# Altium PCB pcb.PcbDoc (part 2 of 2)
Units mm, origin at the board's own origin, x right, y up, seen from the top; angles counter-clockwise.
Board outline 152.4 x 101.6 mm, 4 copper layers (Top Layer, Internal Plane 1, Internal Plane 2, Bottom Layer); 121 components, 160 nets, 1544 pads, 60 vias.
Unrouted connection lines stored in the file: 211.
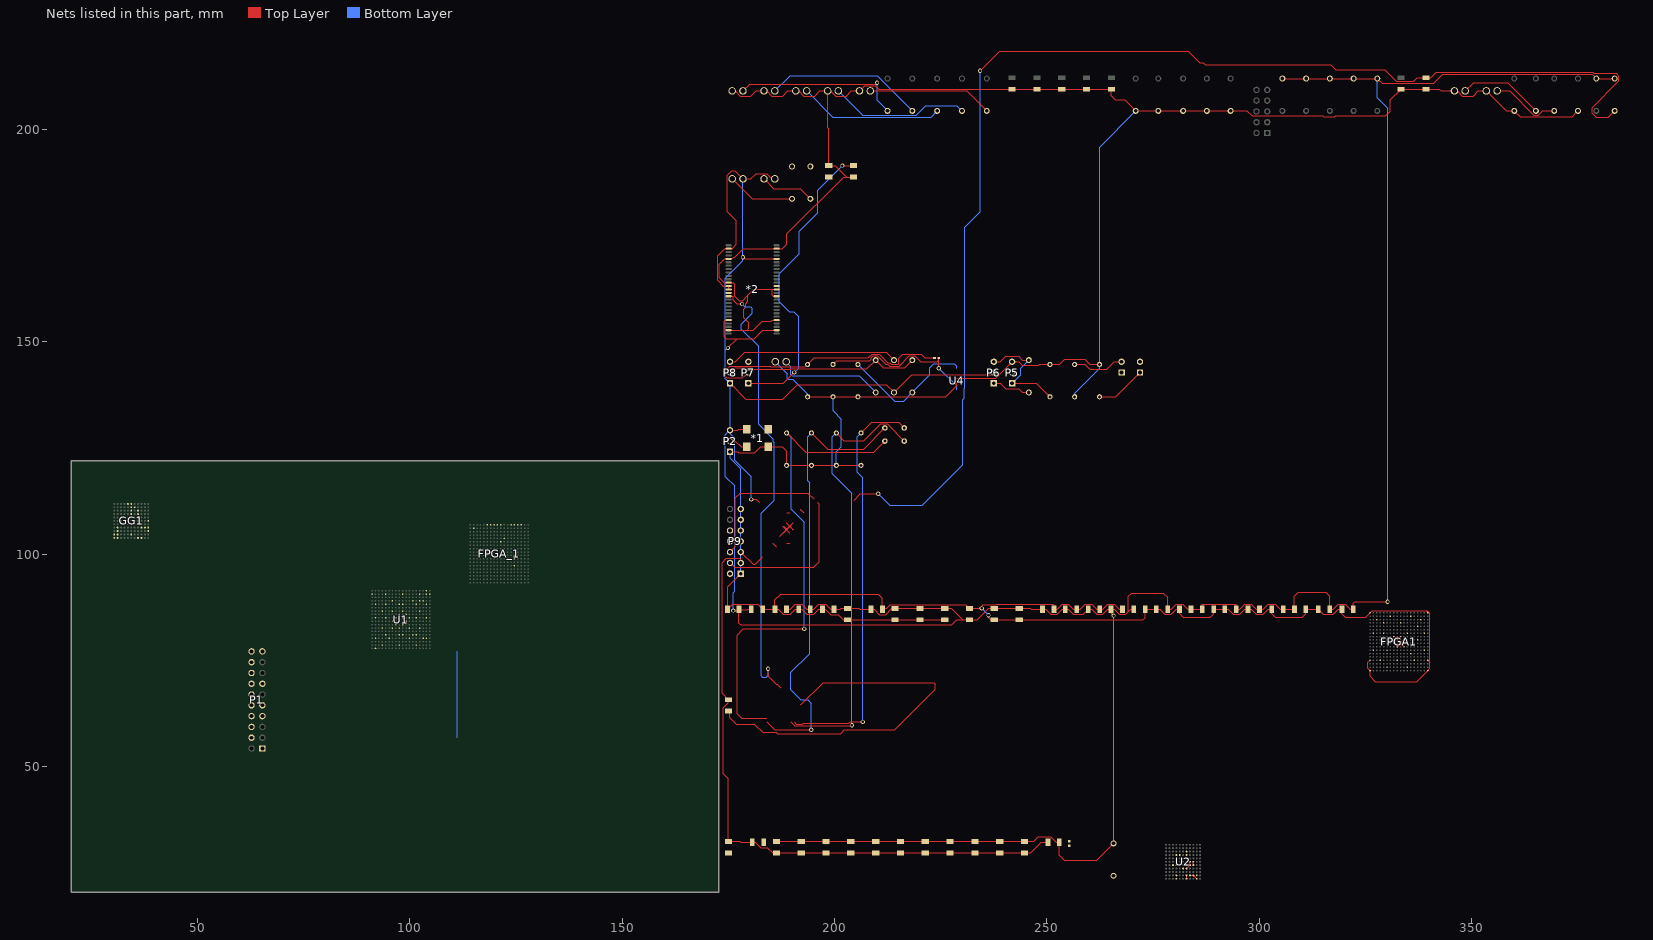
[diagram p4: the nets of this part, all layers, seen from the top]

## Via types
v1: diameter 1, hole 0.6, Top Layer to Bottom Layer, 60 vias

## Nets (pads, with @x,y where several pads share a name; then routed paths per layer and width w, separated by ;. In a path a pad name is that pad's centre, name@x,y a point inside that pad or via, vN(x,y) a via of type N, cw(c..) or ccw(c..) an arc to the next point about the centre after c; other vN are vias at no path point) (continued)
GPIO_FPGA3: C55.2 FPGA_1.A6 R7.1 | length 300
  Top Layer w0.2: 204.591,112.718 206.046,114.173 v1(210.312,114.173) ; v1(234.264,213.817) 238.868,218.421 283.261,218.421 286.036,215.646 286.817,215.646 287.274,215.189 316.865,215.189 318.033,214.02 329.514,214.02 332.232,211.303 336.318,211.303 337.185,212.17 C55.2@339.217,212.17 340.389,212.17 341.605,213.385 378.46,213.385 378.689,213.157 384.048,213.157 384.667,212.538 384.667,211.388 378.333,205.054 378.333,203.81 379.349,202.794 382.118,202.794 R7.1@383.667,204.343
  Bottom Layer w0.2: v1(210.312,114.173) 213.036,111.449 220.593,111.449 230.226,121.082 230.226,136.373 230.581,136.728 230.581,139.09 230.632,139.141 230.632,176.911 234.264,180.543 v1(234.264,213.817)
GPIO_FPGA4: FPGA_1.A7
GPIO_FPGA5: FPGA_1.A8
GPIO_FPGA6: FPGA_1.A9
GPIO_FPGA7: FPGA_1.A10
GPIO_FPGA8: FPGA_1.F10
GPIO_FPGA9: FPGA_1.E11
GPIO_FPGA10: FPGA_1.A13
GPIO_FPGA11: FPGA_1.A14
GPIO_FPGA12: FPGA_1.A15
GPIO_FPGA13: FPGA_1.A16
GPIO_FPGA14: FPGA_1.B2
Net1_1: 1.1 R3.1 | length 25.2
  Bottom Layer w0.2: 1.1@188.595,145.288 189.725,144.158 189.725,142.227 189.992,141.961 205.765,141.961 R3.1@209.677,138.049
Net*1_1: *1.1 P2.2 | length 4.5
  Top Layer w0.2: P2.2@175.387,126.619 176.657,126.619 178.054,125.222 *1.1@179.324,125.222
Net*1_3: *1.3 FPGA_1.L12
Net*2_15: *2.15 FPGA_1.L14 GG1.B6
Net*2_16: *2.16 GG1.A5 | length 108.6
  Top Layer w0.2: *2.16@175.071,160.706 176.096,160.706 176.096,159.768 176.987,158.877 v1(178.232,158.877) ; v1(184.353,72.974) 184.353,71.216 186.253,69.316 186.487,69.316 187.287,68.516
  Bottom Layer w0.2: v1(178.232,158.877) 178.867,158.242 180.238,158.242 180.67,157.81 180.67,156.743 178.054,154.127 178.054,152.984 182.118,148.92 182.118,130.531 185.596,127.052 185.596,126.39 185.82,126.167 185.82,112.667 182.74,109.588 182.74,71.323 183.02,71.044 183.896,71.044 184.353,71.501 v1(184.353,72.974)
Net*2_42: *2.42 FPGA_1.N14 GG1.C6
NetACS1_3: GG1.H9
NetACS1_4: P6.1 R1.1 | length 9.1
  Top Layer w0.2: P6.1@237.49,140.208 239.014,140.208 240.284,138.938 243.332,138.938 244.221,138.049 R1.1@245.745,138.049
NetACS1_5: C48.1 P5.1 P6.3 R1.2 | length 26.4
  Top Layer w0.2: P6.3@237.49,145.288 239.014,145.288 240.284,146.558 243.332,146.558 244.221,145.669 R1.2@245.745,145.669 ; P5.1@241.808,140.208 247.523,140.208 C48.1@250.698,137.033
  Bottom Layer w0.2: P5.1@241.808,140.208 243.789,142.189 243.789,143.713 R1.2@245.745,145.669
NetACS2_4: P8.3 R2.2 | length 40.3
  Top Layer w0.2: P8.3@175.387,145.288 176.624,145.288 178.805,147.469 212.195,147.469 R2.2@213.995,145.669
NetC42_2: C42.2 GG1.K1 X2.2 | length 116.4
  Top Layer w0.2: 184.087,61.316 178.104,61.316 177.038,62.382 177.038,80.899 178.511,82.372 v1(192.888,82.372) ; C42.2@188.722,128.524 193.243,124.003 209.246,124.003 X2.2@211.836,126.593
  Bottom Layer w0.2: C42.2@188.722,128.524 189.789,127.457 189.789,110.592 192.888,107.493 v1(192.888,82.372)
NetC43_2: C43.2 GG1.L1 X2.1 | length 107.4
  Top Layer w0.2: 184.087,60.516 185.954,58.649 v1(194.539,58.649) ; C43.2@194.564,128.524 198.374,124.714 206.857,124.714 X2.1@211.836,129.693
  Bottom Layer w0.2: v1(194.539,58.649) 194.539,64.821 193.675,65.684 192.049,65.684 189.662,68.072 189.662,72.136 194.107,76.581 194.107,116.84 193.65,117.297 193.65,127.61 C43.2@194.564,128.524
NetC44_2: C44.2 GG1.L8 X1.2 | length 106
  Top Layer w0.2: 189.687,60.516 190.612,59.591 203.965,59.591 v1(204.089,59.715) ; C44.2@200.406,128.524 202.209,126.721 206.923,126.721 210.845,130.643 212.358,130.643 X1.2@216.408,126.593
  Bottom Layer w0.2: C44.2@200.406,128.524 199.492,127.61 199.492,118.923 204.089,114.325 v1(204.089,59.715)
NetC45_2: C45.2 GG1.L9 X1.1 | length 97.3
  Top Layer w0.2: 190.487,60.516 191.012,59.991 192.483,59.991 192.608,60.116 203.302,60.116 203.701,60.515 206.591,60.515 v1(206.629,60.477) ; C45.2@206.248,128.524 208.767,131.043 215.058,131.043 X1.1@216.408,129.693
  Bottom Layer w0.2: C45.2@206.248,128.524 205.334,127.61 205.334,119.278 206.629,117.983 v1(206.629,60.477)
NetC46_1: C46.1 P4.1 | length 11.9
  Top Layer w0.2: C46.1@262.382,137.033 266.192,137.033 P4.1@271.907,142.748
NetC47_2: C47.2 P3.2 | length 12.3
  Top Layer w0.2: C47.2@256.54,144.653 258.877,144.653 260.045,143.485 264.084,143.485 265.887,145.288 P3.2@267.589,145.288
NetC49_2: C49.2 L1.1 P7.2 | length 61.6
  Top Layer w0.2: P7.2@179.705,142.748 178.435,141.478 174.574,141.478 174.337,141.715 174.337,143.256 175.302,144.221 184.861,144.221 184.988,144.094 193.116,144.094 C49.2@193.675,144.653 195.199,146.177 207.947,146.177 208.839,147.069 210.515,147.069 212.515,145.069 212.944,145.069 213.344,144.669 215.011,144.669 215.064,144.722 215.064,146.131 216.002,147.069 220.393,147.069 221.285,146.177 L1.1@223.528,146.177
NetC50_2: C50.2 L1.2 U4.1 | length 38.3
  Top Layer w0.2: C50.2@199.644,144.653 200.544,145.553 208.332,145.553 208.677,145.898 208.677,146.253 209.093,146.669 210.109,146.669 212.109,144.669 212.554,144.669 212.954,144.269 215.232,144.269 217.632,146.669 218.862,146.669 220.243,145.288 224.122,145.288 224.528,145.694 ; v1(224.528,143.772) 224.528,145.694 ; L1.2@224.528,146.177 224.528,145.694
  Bottom Layer w0.2: v1(224.528,143.772) 228.727,139.573 U4.1@228.727,138.303
NetC51_2: C51.2 FB1.1 U4.3 | length 32.6
  Bottom Layer w0.2: C51.2@205.486,144.653 214.147,135.992 216.256,135.992 FB1.1@218.313,138.049 222.453,142.189 222.453,143.916 223.317,144.78 228.194,144.78 228.727,144.247 U4.3@228.727,143.383
NetC53_1: C53.1
NetC_DEC1_1: C_DEC1.1 GG1.F11 | length 91.3
  Top Layer w0.2: C_DEC1.1@175.006,63.039 175.311,63.039 175.311,61.521 176.862,59.969 181.127,59.969 183.083,58.014 186.233,58.014 186.538,57.709 201.422,57.709 202.336,58.623 214.224,58.623 223.723,68.123 223.723,69.317 223.317,69.723 197.294,69.723 192.087,64.516
NetD1_2: D1.2 R4.1 | length 16
  Top Layer w0.2: D1.2@175.895,188.341 180.594,183.642 R4.1@189.992,183.642
NetD2_2: D2.2 R5.1 | length 12.9
  Top Layer w0.2: D2.2@183.388,188.341 185.725,186.004 191.948,186.004 R5.1@194.31,183.642
NetD3_1: D3.1 R9.1 | length 20.2
  Top Layer w0.2: D3.1@348.488,209.042 350.444,210.998 358.47,210.998 R9.1@365.125,204.343
NetD4_1: D4.1 R10.1 | length 16.2
  Top Layer w0.2: D4.1@355.981,209.042 358.927,209.042 364.626,203.343 365.725,203.343 366.725,204.343 R10.1@369.443,204.343
NetD5_1: D5.1 R22.1 | length 40
  Top Layer w0.2: D5.1@178.435,209.042 180.024,210.631 209.666,210.631 v1(210.007,210.972)
  Bottom Layer w0.2: v1(210.007,210.972) 210.007,206.807 R22.1@212.471,204.343
NetD6_1: D6.1 R23.1 | length 37.3
  Bottom Layer w0.2: D6.1@185.928,209.042 189.535,212.649 210.007,212.649 R23.1@218.313,204.343
NetD7_1: D7.1 R24.1 | length 33.9
  Bottom Layer w0.2: D7.1@193.421,209.042 199.568,202.895 222.707,202.895 R24.1@224.155,204.343
NetD8_1: D8.1 R25.1 | length 32.9
  Bottom Layer w0.2: D8.1@200.914,209.042 206.629,203.327 219.227,203.327 221.463,205.562 228.778,205.562 R25.1@229.997,204.343
NetD9_1: D9.1 R26.1 | length 29.4
  Top Layer w0.2: D9.1@208.407,209.042 231.14,209.042 R26.1@235.839,204.343
NetFB1_2: FB1.2 P8.2 R3.2 | length 45.8
  Top Layer w0.2: P8.2@175.387,142.748 176.454,143.815 180.492,143.815 180.746,143.561 189.725,143.561 189.738,143.573 207.581,143.573 R3.2@209.677,145.669 211.477,143.869 216.513,143.869 FB1.2@218.313,145.669
NetFPGA_1_K14: FPGA_1.K14 GG1.D6
NetGG1_A6: GG1.A6
NetGG1_B7: GG1.B7
NetGG1_H2: GG1.H2
NetGG1_H10: GG1.H10
NetGG1_H11: GG1.H11
NetGG1_J2: GG1.J2
NetGG1_K2: GG1.K2
NetGG1_K6: GG1.K6 P1.19
NetGG1_L2: GG1.L2
NetL_VDD1_1: L_VDD1.1 U2.K8 U2.K9 U2.L10 | length 1.9
  Top Layer w0.2: U2.K8@283.667,24.359 U2.K9@284.455,24.359 ; U2.K9@284.467,24.359 U2.K9@284.455,24.359 ; U2.L10@285.267,23.559 285.255,23.559 U2.K9@284.455,24.359
NetL_VDD1_2: L_VDD1.2 R_AVDD1.1
NetP5_2: P5.2
NetP9_4: P9.4 U1.B18 | length 36.2
  Top Layer w0.2: P9.4@175.387,97.917 176.454,96.85 195.097,96.85 196.393,98.146 196.393,111.682 195.903,112.172
NetP9_6: P9.6 U1.A17 | length 32.8
  Top Layer w0.2: P9.6@175.387,100.457 176.657,101.727 176.657,113.233 177.8,114.376 193.699,114.376 195.103,112.972
NetP9_8: P9.8 U1.D16
NetP9_10: P9.10 U1.D15
NetR4_2: R4.2
NetR5_2: R5.2
PWRIN: P7.3
SWCLK: GG1.E8 P1.9
SWDIO: GG1.D8 P1.7
SWO: GG1.C8 P1.13
TOADC: GG1.J11
USB_5V: C52.2 P7.1 | length 72.3
  Top Layer w0.2: P7.1@179.705,140.208 187.96,140.208 v1(190.525,142.773) ; v1(201.854,191.465) 201.858,191.469 C52.2@204.47,191.469
  Bottom Layer w0.2: v1(190.525,142.773) 191.541,143.789 191.541,155.854 190.373,157.023 189.382,157.023 186.969,159.436 186.969,166.04 191.643,170.713 191.643,175.997 196.063,180.416 196.063,185.674 v1(201.854,191.465)
USB_GND: 1.2 *1.2 *2.5 *2.12 *2.26 *2.32 *2.39 *2.41 *2.53 C1.2 C2.2 C3.2 C4.2 C5.2 C6.1 C7.1 C8.2 C9.1 C10.1 C11.1 C12.2 C13.1 C14.1 C15.1 C16.2 C17.1 C18.1 C19.1 C20.1 C21.2 C22.1 C23.1 C24.1 C25.2 C26.1 C27.1 C28.1 C29.1 C30.1 C31.1 C32.1 C33.1 C34.1 C35.1 C36.1 C37.1 C38.1 C39.1 C40.2 C41.1 C42.1 C43.1 C44.1 C45.1 C46.2 C47.1 C48.2 C49.1 C50.1 C51.1 C52.1 C53.2 C54.1 C55.1 C56.1 C57.1 C58.1 C59.1 C60.1 C_DEC1.2 D3.2 D4.2 D5.2 D6.2 D7.2 D8.2 D9.2 FPGA1.A1 FPGA1.A18 FPGA1.B7 FPGA1.B13 FPGA1.C3 FPGA1.C16 FPGA1.D5 FPGA1.D10 FPGA1.E15 FPGA1.G2 FPGA1.G5 FPGA1.G12 FPGA1.G17 FPGA1.H8 FPGA1.H10 FPGA1.J4 FPGA1.J9 FPGA1.J11 FPGA1.J15 FPGA1.K8 FPGA1.K10 FPGA1.L9 FPGA1.L11 FPGA1.M2 FPGA1.M6 FPGA1.M17 FPGA1.N13 FPGA1.R1 FPGA1.R4 FPGA1.R9 FPGA1.R14 FPGA1.R18 FPGA1.T16 FPGA1.U6 FPGA1.U12 FPGA1.V1 FPGA1.V18 P1.4 P1.6 P1.8 P1.10 P1.12 P1.14 P1.16 P1.18 P1.20 P2.1 P5.3 P9.1 P9.3 P9.5 P9.7 P9.9 P9.11 P9.13 R8.1 R11.1 R17.1 R18.1 R19.1 R20.1 R21.1 U1.P13 U1.R16 U1.V2 U2.C7 U2.D4 U2.F9 U2.G3 U2.G9 U2.H6 U2.K4 U2.K7 U2.K10 U2.L7 U4.2 | length 1072.2
  Top Layer w0.2: *2.26@175.071,152.706 179.426,152.706 ; P2.1@175.387,124.079 177.216,124.079 177.495,123.8 181.153,123.8 182.575,125.222 *1.2@184.404,125.222 187.655,125.222 188.722,124.155 C42.1@188.722,120.904 C43.1@194.564,120.904 C44.1@200.406,120.904 C45.1@206.248,120.904 ; D5.2@175.895,209.042 176.581,209.042 177.775,207.848 180.315,207.848 181.508,209.042 D6.2@183.388,209.042 184.048,209.042 185.242,207.848 187.808,207.848 189.001,209.042 D7.2@190.881,209.042 191.541,209.042 192.735,207.848 195.301,207.848 196.494,209.042 D8.2@198.374,209.042 ; P9.1@177.927,95.377 174.799,92.249 C15.1@174.799,86.995 176.018,88.214 181.868,88.214 C16.2@183.087,86.995 C17.1@185.975,86.995 ; P9.3@177.927,97.917 177.927,98.755 177.698,98.984 174.549,98.984 173.533,97.968 173.533,67.212 C_DEC1.2@175.006,65.739 175.006,64.973 173.838,63.805 173.838,48.26 175.006,47.092 C40.2@175.006,32.338 177.698,32.338 177.905,32.131 C41.1@180.641,32.131 181.356,32.131 182.626,30.861 184.197,30.861 185.42,29.638 C32.1@186.309,29.638 C33.1@192.151,29.638 C34.1@197.993,29.638 C35.1@203.835,29.638 C36.1@209.677,29.638 C37.1@215.519,29.638 C38.1@221.361,29.638 C39.1@227.203,29.638 C28.1@233.045,29.638 C29.1@238.887,29.638 C30.1@244.729,29.638 246.228,29.638 248.721,32.131 C31.1@250.237,32.131 ; P9.5@177.927,100.457 180.823,97.561 181.292,97.561 183.103,99.372 ; *2.32@186.371,155.106 185.346,155.106 185.074,154.834 183.026,154.834 180.899,152.706 179.426,152.706 ; *2.39@186.371,160.706 185.572,160.706 185.344,160.934 185.344,162.306 ; *2.41@186.371,162.306 185.344,162.306 ; C49.1@193.675,137.033 C50.1@199.644,137.033 C51.1@205.486,137.033 226.187,137.033 228.727,139.573 U4.2@228.727,140.843 228.727,141.224 228.93,141.427 237.947,141.427 P5.3@241.808,145.288 243.332,145.288 244.196,144.424 248.107,144.424 248.336,144.653 C48.2@250.698,144.653 253.035,144.653 254.203,145.821 258.877,145.821 260.045,144.653 C46.2@262.382,144.653 ; C52.1@204.47,188.769 202.877,188.769 ; C21.2@211.281,86.995 C21.2@211.281,87.3 ; C24.1@225.933,84.502 C23.1@220.091,84.502 C22.1@214.249,84.502 C20.1@203.073,84.502 202.061,84.502 200.838,85.725 199.136,85.725 197.866,86.995 C19.1@197.151,86.995 196.291,86.995 195.123,85.827 193.497,85.827 192.329,86.995 C18.1@191.563,86.995 190.703,86.995 189.535,85.827 187.909,85.827 186.741,86.995 C17.1@185.975,86.995 ; v1(234.645,87.202) 234.065,87.202 ; v1(236.245,85.602) 236.245,84.985 236.728,84.502 C26.1@237.617,84.502 C27.1@243.459,84.502 272.593,84.502 273.13,85.039 C5.2@273.13,86.995 C6.1@275.764,86.995 276.53,86.995 277.698,85.827 279.273,85.827 280.441,86.995 C7.1@281.225,86.995 281.225,85.954 282.038,85.141 288.446,85.141 289.259,85.954 C8.2@289.259,86.995 C9.1@291.893,86.995 292.659,86.995 293.827,85.827 295.402,85.827 296.57,86.995 C10.1@297.354,86.995 298.12,86.995 299.288,85.827 300.914,85.827 302.082,86.995 C11.1@302.942,86.995 302.942,85.954 303.755,85.141 310.163,85.141 310.976,85.954 C12.2@310.976,86.995 C13.1@313.864,86.995 315.032,85.827 317.424,85.827 318.592,86.995 C14.1@319.452,86.995 319.452,85.954 320.29,85.115 325.007,85.115 FPGA1.A1@326.067,86.175 326.557,86.665 339.177,86.665 ; C4.2@267.796,86.995 267.03,86.995 265.862,88.163 264.363,88.163 263.195,86.995 C3.2@262.462,86.995 261.696,86.995 260.528,88.163 258.978,88.163 257.81,86.995 C2.2@257.001,86.995 256.235,86.995 255.067,88.163 253.568,88.163 252.4,86.995 C1.2@251.667,86.995 251.667,87.855 251.358,88.163 238.176,88.163 238.125,88.113 234.975,88.113 234.065,87.202 ; U2.L7@282.867,23.559 U2.K7@282.867,24.359 ; U2.G9@284.467,26.759 U2.F9@284.467,27.559 ; FPGA1.R1@326.067,74.975 325.577,74.485 325.577,73.065 FPGA1.V1@326.067,72.575 326.067,71.214 327.355,69.926 337.018,69.926 FPGA1.V18@339.667,72.575 340.157,73.065 340.157,74.485 ; FPGA1.K8@331.667,78.975 332.156,79.464 332.156,80.086 332.197,80.127 ; FPGA1.H8@331.667,80.575 331.749,80.575 332.197,80.127 ; FPGA1.K10@333.267,78.975 FPGA1.K10@333.261,78.975 ; FPGA1.H10@333.267,80.575 FPGA1.H10@333.261,80.575 ; FPGA1.L11@334.067,78.175 333.959,78.175 333.369,78.765 333.146,78.765 332.556,78.175 FPGA1.L9@332.467,78.175 332.461,78.175 FPGA1.K10@333.261,78.975 ; FPGA1.J11@334.067,79.775 FPGA1.J11@334.048,79.775 ; FPGA1.R18@339.667,74.975 340.157,74.485 ; FPGA1.A18@339.667,86.175 339.177,86.665 ; R8.1@375.031,204.343 373.631,202.943 361.445,202.943 R11.1@360.045,204.343 358.14,204.343 D4.2@353.441,209.042 351.561,209.042 350.368,207.848 347.802,207.848 346.608,209.042 D3.2@345.948,209.042 342.795,209.042 342.367,209.47 C55.1@339.217,209.47 C54.1@333.375,209.47 330.886,206.981 330.886,204.241 329.794,203.149 318.011,203.149 317.805,202.943 315.211,202.943 315.005,203.149 298.298,203.149 297.104,204.343 R17.1@293.243,204.343 R18.1@287.655,204.343 R19.1@282.067,204.343 R20.1@276.225,204.343 R21.1@270.891,204.343 268.326,206.908 266.141,206.908 265.176,207.874 C60.1@265.176,209.47 C59.1@259.334,209.47 C58.1@253.492,209.47 C57.1@247.65,209.47 C56.1@241.808,209.47 210.362,209.47 209.601,210.231 207.056,210.231 D9.2@205.867,209.042 203.987,209.042 202.794,207.848 200.228,207.848 199.034,209.042 D8.2@198.374,209.042 ; 179.426,152.706 179.845,153.125 179.845,154.47 178.638,155.677 178.638,157.691 179.032,158.084 179.032,158.991 179.527,159.487 179.527,160.884 ; 179.527,160.884 178.328,159.684 177.543,159.684 176.496,160.731 176.496,163.584 176.174,163.906 *2.12@175.071,163.906 174.067,163.906 172.86,165.113 172.86,168.223 174.142,169.506 *2.5@175.071,169.506 175.816,169.506 176.223,169.913 176.505,169.913 178.498,171.906 *2.53@186.371,171.906 187.683,171.906 188.7,172.923 188.7,175.362 202.108,188.769 202.877,188.769 ; 179.527,160.884 180.95,162.306 185.344,162.306 ; C17.1@185.975,86.995 185.975,89.205 187.296,90.526 210.312,90.526 211.281,89.557 C21.2@211.281,87.3 ; D8.2@198.374,209.042 198.374,200.381 198.628,200.127 C53.2@198.628,191.469 200.177,191.469 202.877,188.769 ; C21.2@211.281,87.3 212.344,87.3 213.106,88.062 230.915,88.062 C25.2@231.775,87.202 233.672,87.202 234.065,87.202 ; 332.197,80.127 332.34,79.985 332.562,79.985 333.153,80.575 FPGA1.H10@333.261,80.575 ; FPGA1.K10@333.261,78.975 333.248,78.975 FPGA1.J11@334.048,79.775 ; FPGA1.H10@333.261,80.575 332.461,79.775 FPGA1.J9@332.467,79.775 332.562,79.775 333.165,79.172 333.35,79.172 333.953,79.775 FPGA1.J11@334.048,79.775 ; 339.177,86.665 339.547,86.665 340.157,86.055 340.157,74.485
  Bottom Layer w0.2: 111.125,56.769 111.125,59.309 111.125,61.849 111.125,64.389 111.125,66.929 111.125,69.469 111.125,72.009 111.125,74.549 111.125,77.089 ; P2.1@175.387,124.079 175.387,122.58 177.927,120.04 P9.13@177.927,110.617 P9.11@177.927,108.077 P9.9@177.927,105.537 P9.7@177.927,102.997 P9.5@177.927,100.457 P9.3@177.927,97.917 P9.1@177.927,95.377 ; 1.2@186.055,145.288 188.84,142.503 188.84,141.427 189.107,141.161 190.182,141.161 193.675,137.668 C49.1@193.675,137.033 ; C50.1@199.644,137.033 199.644,133.731 201.574,131.801 201.574,125.298 200.406,124.13 C44.1@200.406,120.904 ; v1(234.645,87.202) v1(236.245,85.602) ; C47.1@256.54,137.033 256.54,137.922 262.382,143.764 C46.2@262.382,144.653 262.382,195.834 R21.1@270.891,204.343
USB_VREGI: C41.2
USB_VREGO: C40.1
VCC12: P4.2 U1.G7 U1.H9 U1.H11 U1.J8 U1.J10 U1.K9 U1.K11 U1.L8 U1.L10 U1.M7 U1.M12 | length 14.2
  Top Layer w0.2: 187.103,104.172 187.096,104.172 187.896,104.972 187.903,104.972 ; 188.703,107.372 188.703,107.258 189.306,106.655 189.306,106.477 ; 189.503,104.972 189.389,104.972 188.798,105.562 188.576,105.562 187.985,104.972 187.903,104.972 ; 189.503,106.572 189.484,106.572 ; 190.303,105.772 190.246,105.829 190.189,105.772 189.752,106.209 ; 190.303,107.372 190.293,107.362 ; 187.903,104.972 187.903,105.054 188.493,105.645 188.493,105.867 187.903,106.458 187.903,106.572 187.985,106.572 188.589,105.969 188.798,105.969 189.306,106.477 ; 189.306,106.477 189.306,106.47 188.703,105.867 188.703,105.772 188.798,105.772 189.401,106.375 189.586,106.375 189.752,106.209 ; 189.306,106.477 189.401,106.572 189.484,106.572 ; 189.484,106.572 190.284,107.372 190.293,107.362 ; 189.752,106.209 189.809,106.266 189.809,106.878 190.293,107.362
VCC18: P3.1
VCC33: *1.4 *2.2 *2.13 *2.14 *2.23 *2.29 *2.50 C1.1 C2.1 C3.1 C4.1 C5.1 C6.2 C7.2 C8.1 C9.2 C10.2 C11.2 C12.1 C13.2 C14.2 C15.2 C16.1 C17.2 C18.2 C19.2 C20.2 C21.1 C22.2 C23.2 C24.2 C25.1 C26.2 C27.2 C28.2 C29.2 C30.2 C31.2 C32.2 C33.2 C34.2 C35.2 C36.2 C37.2 C38.2 C39.2 D1.1 D2.1 P1.1 P2.3 P6.2 P8.1 R2.1 R6.2 R7.2 R12.2 R13.2 R14.2 R15.2 R16.2 R_AVDD1.2 U1.B1 U1.B5 U1.B10 U1.B15 U1.B17 U1.D7 U1.D13 U1.E2 U1.E5 U1.E9 U1.E10 U1.E14 U1.E17 U1.G4 U1.G10 U1.G15 U1.J2 U1.J5 U1.J12 U1.J14 U1.J17 U1.K7 U1.M4 U1.M9 U1.M15 U1.P5 U1.P9 U1.P10 U1.P14 U1.R2 U1.R6 U1.R12 U1.R17 U1.U4 U1.U9 U1.U14 U2.D5 U2.D7 U2.F8 U2.G4 U2.G8 U2.H7 U2.L4 | length 859.5
  Top Layer w0.2: v1(174.904,148.539) 177.063,150.698 ; *2.23@175.071,155.106 174.308,155.106 174.041,154.838 174.041,151.206 174.549,150.698 177.063,150.698 ; *2.14@175.071,162.306 *2.13@175.071,163.106 173.815,163.106 172.446,164.475 172.446,170.21 174.142,171.906 *2.2@175.071,171.906 175.868,171.906 176.886,172.923 176.886,178.435 174.701,180.619 174.701,189.179 175.819,190.297 176.479,190.297 D1.1@178.435,188.341 180.315,188.341 181.508,189.535 184.048,189.535 185.242,188.341 D2.1@185.928,188.341 ; P2.3@175.387,129.159 177.216,129.159 177.479,129.422 *1.4@179.324,129.422 ; P8.1@175.387,140.208 179.121,136.474 187.858,136.474 191.237,139.852 212.192,139.852 R2.1@213.995,138.049 218.161,142.215 236.957,142.215 P6.2@237.49,142.748 ; v1(176.149,86.69) C15.2@177.499,86.69 ; C15.2@177.499,86.995 C15.2@177.499,86.895 ; v1(178.435,169.912) 178.841,169.506 *2.50@186.371,169.506 ; C16.1@180.387,86.995 179.686,86.995 179.586,86.895 C15.2@177.499,86.895 ; v1(180.391,112.878) 181.597,112.878 182.303,112.172 ; 185.503,102.572 185.496,102.572 186.296,101.772 186.303,101.772 ; C32.2@186.309,32.338 C33.2@192.151,32.338 C34.2@197.993,32.338 C35.2@203.835,32.338 C36.2@209.677,32.338 C37.2@215.519,32.338 C38.2@221.361,32.338 C39.2@227.203,32.338 C28.2@233.045,32.338 C29.2@238.887,32.338 C30.2@244.729,32.338 246.939,32.338 248.002,33.401 250.952,33.401 252.222,32.131 C31.2@252.937,32.131 252.937,29.058 254.08,27.915 261.722,27.915 R_AVDD1.2@265.684,31.877 ; *2.29@186.371,152.706 183.135,152.706 181.127,150.698 177.063,150.698 ; C17.2@188.675,86.995 189.535,86.995 190.703,88.163 192.329,88.163 193.497,86.995 C18.2@194.263,86.995 195.123,86.995 196.291,88.163 197.917,88.163 199.085,86.995 C19.2@199.851,86.995 201.346,86.995 201.553,87.202 C20.2@203.073,87.202 205.715,87.202 205.922,86.995 C21.1@208.581,86.995 209.296,86.995 210.566,85.725 212.014,85.725 213.491,87.202 C22.2@214.249,87.202 C23.2@220.091,87.202 C24.2@225.933,87.202 227.482,87.202 230.182,84.502 ; 188.703,102.572 189.503,102.572 ; 188.703,109.772 189.503,109.772 ; 191.903,110.572 191.897,110.572 192.697,109.772 192.703,109.772 ; v1(265.684,85.522) 265.096,86.11 C4.1@265.096,86.995 ; C5.1@270.43,86.995 269.697,86.995 269.113,86.411 ; U2.H7@282.867,25.959 282.854,25.959 283.654,26.759 U2.G8@283.667,26.759 U2.F8@283.667,27.559 ; R12.2@305.435,211.963 R13.2@311.023,211.963 R14.2@316.611,211.963 R15.2@322.199,211.963 R16.2@327.787,211.963 328.905,210.845 341.046,210.845 343.179,212.979 378.287,212.979 378.578,212.688 378.624,212.688 R6.2@379.349,211.963 R7.2@383.667,211.963 ; v1(330.2,88.798) 322.558,88.798 322.152,88.392 C14.2@322.152,86.995 321.386,86.995 320.218,88.163 318.592,88.163 317.424,86.995 C13.2@316.564,86.995 316.564,90.018 315.624,90.957 309.216,90.957 308.276,90.018 C12.1@308.276,86.995 C11.2@305.642,86.995 304.876,86.995 303.708,88.163 302.082,88.163 300.914,86.995 C10.2@300.054,86.995 299.288,86.995 298.12,88.163 296.545,88.163 295.377,86.995 C9.2@294.593,86.995 294.593,88.163 286.559,88.163 C8.1@286.559,86.995 C7.2@283.925,86.995 283.159,86.995 281.991,88.163 280.441,88.163 279.273,86.995 C6.2@278.464,86.995 278.464,89.781 277.415,90.83 269.926,90.83 269.113,90.018 269.113,86.411 ; C15.2@177.499,86.69 C15.2@177.499,86.895 ; C15.2@177.499,86.69 177.499,83.693 177.855,83.337 227.609,83.337 228.774,84.502 230.182,84.502 ; 230.182,84.502 C25.1@231.775,84.502 233.6,84.502 236.3,87.202 C26.2@237.617,87.202 C27.2@243.459,87.202 246.101,87.202 246.308,86.995 C1.1@248.967,86.995 249.733,86.995 250.901,85.827 252.4,85.827 253.568,86.995 C2.1@254.301,86.995 255.067,86.995 256.235,85.827 258.594,85.827 C3.1@259.762,86.995 260.528,86.995 261.696,85.827 263.195,85.827 264.363,86.995 C4.1@265.096,86.995 ; C4.1@265.096,86.995 265.862,86.995 267.03,85.827 268.529,85.827 269.113,86.411
  Bottom Layer w0.2: v1(174.904,148.539) 174.32,147.955 ; v1(176.149,86.69) 176.149,90.932 176.454,91.237 176.454,116.103 174.32,118.237 174.32,128.092 P2.3@175.387,129.159 ; D1.1@178.435,188.341 v1(178.435,169.912) 178.435,169.104 174.32,164.99 174.32,147.955 ; v1(180.391,112.878) 180.391,118.161 176.455,122.096 176.455,127.295 175.387,128.363 P2.3@175.387,129.159 ; R_AVDD1.2@265.684,31.877 v1(265.684,85.522) ; R16.2@327.787,211.963 327.787,207.391 330.2,204.978 v1(330.2,88.798) ; 174.32,147.955 174.32,141.275 P8.1@175.387,140.208 P2.3@175.387,129.159
VCC33V: P9.2
pads on no net: *2.40 *2.43 FPGA1.A2 FPGA1.A3 FPGA1.A4 FPGA1.A5 FPGA1.A6 FPGA1.A7 FPGA1.A8 FPGA1.A9 FPGA1.A10 FPGA1.A11 FPGA1.A12 FPGA1.A13 FPGA1.A14 FPGA1.A15 FPGA1.A16 FPGA1.A17 FPGA1.B1 FPGA1.B2 FPGA1.B3 FPGA1.B4 FPGA1.B5 FPGA1.B6 FPGA1.B8 FPGA1.B9 FPGA1.B10 FPGA1.B11 FPGA1.B12 FPGA1.B14 FPGA1.B15 FPGA1.B16 FPGA1.B17 FPGA1.B18 FPGA1.C1 FPGA1.C2 FPGA1.C4 FPGA1.C5 FPGA1.C6 FPGA1.C7 FPGA1.C8 FPGA1.C9 FPGA1.C10 FPGA1.C11 FPGA1.C12 FPGA1.C13 FPGA1.C14 FPGA1.C15 FPGA1.C17 FPGA1.C18 FPGA1.D1 FPGA1.D2 FPGA1.D3 FPGA1.D4 FPGA1.D6 FPGA1.D7 FPGA1.D8 FPGA1.D9 FPGA1.D11 FPGA1.D12 FPGA1.D13 FPGA1.D14 FPGA1.D15 FPGA1.D16 FPGA1.D17 FPGA1.D18 FPGA1.E1 FPGA1.E2 FPGA1.E3 FPGA1.E4 FPGA1.E5 FPGA1.E6 FPGA1.E7 FPGA1.E8 FPGA1.E9 FPGA1.E10 FPGA1.E11 FPGA1.E12 FPGA1.E13 FPGA1.E14 FPGA1.E16 FPGA1.E17 FPGA1.E18 FPGA1.F1 FPGA1.F2 FPGA1.F3 FPGA1.F4 FPGA1.F5 FPGA1.F6 FPGA1.F7 FPGA1.F8 FPGA1.F9 FPGA1.F10 FPGA1.F11 FPGA1.F12 FPGA1.F13 FPGA1.F14 FPGA1.F15 FPGA1.F16 FPGA1.F17 FPGA1.F18 FPGA1.G1 FPGA1.G3 FPGA1.G4 FPGA1.G6 FPGA1.G7 FPGA1.G8 FPGA1.G9 FPGA1.G10 FPGA1.G11 FPGA1.G13 FPGA1.G14 FPGA1.G15 FPGA1.G16 FPGA1.G18 FPGA1.H1 FPGA1.H2 FPGA1.H3 FPGA1.H4 FPGA1.H5 FPGA1.H6 FPGA1.H7 FPGA1.H9 FPGA1.H11 FPGA1.H12 FPGA1.H13 FPGA1.H14 FPGA1.H15 FPGA1.H16 FPGA1.H17 FPGA1.H18 FPGA1.J1 FPGA1.J2 FPGA1.J3 FPGA1.J5 FPGA1.J6 FPGA1.J7 FPGA1.J8 FPGA1.J10 FPGA1.J12 FPGA1.J13 FPGA1.J14 FPGA1.J16 FPGA1.J17 FPGA1.J18 FPGA1.K1 FPGA1.K2 FPGA1.K3 FPGA1.K4 FPGA1.K5 FPGA1.K6 FPGA1.K7 FPGA1.K9 FPGA1.K11 FPGA1.K12 FPGA1.K13 FPGA1.K14 FPGA1.K15 FPGA1.K16 FPGA1.K17 FPGA1.K18 FPGA1.L1 FPGA1.L2 FPGA1.L3 FPGA1.L4 FPGA1.L5 FPGA1.L6 FPGA1.L7 FPGA1.L8 FPGA1.L10 FPGA1.L12 FPGA1.L13 FPGA1.L14 FPGA1.L15 FPGA1.L16 FPGA1.L17 FPGA1.L18 FPGA1.M1 FPGA1.M3 FPGA1.M4 FPGA1.M5 FPGA1.M7 FPGA1.M8 FPGA1.M9 FPGA1.M10 FPGA1.M11 FPGA1.M12 FPGA1.M13 FPGA1.M14 FPGA1.M15 FPGA1.M16 FPGA1.M18 FPGA1.N1 FPGA1.N2 FPGA1.N3 FPGA1.N4 FPGA1.N5 FPGA1.N6 FPGA1.N7 FPGA1.N8 FPGA1.N9 FPGA1.N10 FPGA1.N11 FPGA1.N12 FPGA1.N14 FPGA1.N15 FPGA1.N16 FPGA1.N17 FPGA1.N18 FPGA1.P1 FPGA1.P2 FPGA1.P3 FPGA1.P4 FPGA1.P5 FPGA1.P6 FPGA1.P7 FPGA1.P8 FPGA1.P9 FPGA1.P10 FPGA1.P11 FPGA1.P12 FPGA1.P13 FPGA1.P14 FPGA1.P15 FPGA1.P16 FPGA1.P17 FPGA1.P18 FPGA1.R2 FPGA1.R3 FPGA1.R5 FPGA1.R6 FPGA1.R7 FPGA1.R8 FPGA1.R10 FPGA1.R11 FPGA1.R12 FPGA1.R13 FPGA1.R15 FPGA1.R16 FPGA1.R17 FPGA1.T1 FPGA1.T2 FPGA1.T3 FPGA1.T4 FPGA1.T5 FPGA1.T6 FPGA1.T7 FPGA1.T8 FPGA1.T9 FPGA1.T10 FPGA1.T11 FPGA1.T12 FPGA1.T13 FPGA1.T14 FPGA1.T15 FPGA1.T17 FPGA1.T18 FPGA1.U1 FPGA1.U2 FPGA1.U3 FPGA1.U4 FPGA1.U5 FPGA1.U7 FPGA1.U8 FPGA1.U9 FPGA1.U10 FPGA1.U11 FPGA1.U13 FPGA1.U14 FPGA1.U15 FPGA1.U16 FPGA1.U17 FPGA1.U18 FPGA1.V2 FPGA1.V3 FPGA1.V4 FPGA1.V5 FPGA1.V6 FPGA1.V7 FPGA1.V8 FPGA1.V9 FPGA1.V10 FPGA1.V11 FPGA1.V12 FPGA1.V13 FPGA1.V14 FPGA1.V15 FPGA1.V16 FPGA1.V17 FPGA_1.A1 FPGA_1.A4 FPGA_1.A11 FPGA_1.A12 FPGA_1.A17 FPGA_1.A18 FPGA_1.B1 FPGA_1.B3 FPGA_1.B4 FPGA_1.B5 FPGA_1.B6 FPGA_1.B7 FPGA_1.B10 FPGA_1.B11 FPGA_1.B12 FPGA_1.B13 FPGA_1.B14 FPGA_1.B15 FPGA_1.B16 FPGA_1.B17 FPGA_1.B18 FPGA_1.C1 FPGA_1.C2 FPGA_1.C3 FPGA_1.C4 FPGA_1.C5 FPGA_1.C6 FPGA_1.C8 FPGA_1.C9 FPGA_1.C10 FPGA_1.C11 FPGA_1.C12 FPGA_1.C13 FPGA_1.C14 FPGA_1.C15 FPGA_1.C16 FPGA_1.D1 FPGA_1.D2 FPGA_1.D3 FPGA_1.D4 FPGA_1.D5 FPGA_1.D6 FPGA_1.D7 FPGA_1.D8 FPGA_1.D9 FPGA_1.D10 FPGA_1.D11 FPGA_1.D12 FPGA_1.D13 FPGA_1.D14 FPGA_1.D15 FPGA_1.D16 FPGA_1.E1 FPGA_1.E2 FPGA_1.E3 FPGA_1.E4 FPGA_1.E5 FPGA_1.E6 FPGA_1.E7 FPGA_1.E8 FPGA_1.E9 FPGA_1.E10 FPGA_1.E12 FPGA_1.E13 FPGA_1.E14 FPGA_1.E15 FPGA_1.E17 FPGA_1.F1 FPGA_1.F2 FPGA_1.F3 FPGA_1.F4 FPGA_1.F5 FPGA_1.F6 FPGA_1.F7 FPGA_1.F8 FPGA_1.F9 FPGA_1.F11 FPGA_1.F12 FPGA_1.F13 FPGA_1.G1 FPGA_1.G2 FPGA_1.G3 FPGA_1.G4 FPGA_1.G5 FPGA_1.G6 FPGA_1.G7 FPGA_1.G8 FPGA_1.G9 FPGA_1.G10 FPGA_1.G11 FPGA_1.G12 FPGA_1.G15 FPGA_1.G17 FPGA_1.H1 FPGA_1.H2 FPGA_1.H3 FPGA_1.H4 FPGA_1.H5 FPGA_1.H6 FPGA_1.H7 FPGA_1.H8 FPGA_1.H9 FPGA_1.H10 FPGA_1.H11 FPGA_1.J1 FPGA_1.J2 FPGA_1.J3 FPGA_1.J4 FPGA_1.J5 FPGA_1.J6 FPGA_1.J7 FPGA_1.J8 FPGA_1.J9 FPGA_1.J10 FPGA_1.J11 FPGA_1.J12 FPGA_1.J14 FPGA_1.J15 FPGA_1.J17 FPGA_1.K1 FPGA_1.K2 FPGA_1.K3 FPGA_1.K4 FPGA_1.K5 FPGA_1.K6 FPGA_1.K7 FPGA_1.K8 FPGA_1.K9 FPGA_1.K10 FPGA_1.K11 FPGA_1.K15 FPGA_1.K16 FPGA_1.L1 FPGA_1.L2 FPGA_1.L3 FPGA_1.L4 FPGA_1.L5 FPGA_1.L6 FPGA_1.L7 FPGA_1.L8 FPGA_1.L9 FPGA_1.L10 FPGA_1.L11 FPGA_1.L13 FPGA_1.M1 FPGA_1.M2 FPGA_1.M3 FPGA_1.M4 FPGA_1.M5 FPGA_1.M6 FPGA_1.M7 FPGA_1.M8 FPGA_1.M9 FPGA_1.M10 FPGA_1.M11 FPGA_1.M12 FPGA_1.M13 FPGA_1.M14 FPGA_1.M15 FPGA_1.M17 FPGA_1.N1 FPGA_1.N2 FPGA_1.N3 FPGA_1.N4 FPGA_1.N5 FPGA_1.N6 FPGA_1.N7 FPGA_1.N8 FPGA_1.N9 FPGA_1.N10 FPGA_1.N11 FPGA_1.N12 FPGA_1.N13 FPGA_1.N15 FPGA_1.N16 FPGA_1.P1 FPGA_1.P2 FPGA_1.P3 FPGA_1.P4 FPGA_1.P5 FPGA_1.P6 FPGA_1.P7 FPGA_1.P8 FPGA_1.P9 FPGA_1.P10 FPGA_1.P11 FPGA_1.P12 FPGA_1.P13 FPGA_1.P14 FPGA_1.P15 FPGA_1.P16 FPGA_1.R1 FPGA_1.R2 FPGA_1.R3 FPGA_1.R4 FPGA_1.R5 FPGA_1.R6 FPGA_1.R7 FPGA_1.R8 FPGA_1.R9 FPGA_1.R10 FPGA_1.R11 FPGA_1.R12 FPGA_1.R13 FPGA_1.R14 FPGA_1.R15 FPGA_1.R16 FPGA_1.R17 FPGA_1.R18 FPGA_1.T1 FPGA_1.T2 FPGA_1.T3 FPGA_1.T4 FPGA_1.T5 FPGA_1.T6 FPGA_1.T7 FPGA_1.T8 FPGA_1.T9 FPGA_1.T10 FPGA_1.T11 FPGA_1.T12 FPGA_1.T13 FPGA_1.T14 FPGA_1.T15 FPGA_1.T16 FPGA_1.T17 FPGA_1.T18 FPGA_1.U1 FPGA_1.U2 FPGA_1.U3 FPGA_1.U4 FPGA_1.U5 FPGA_1.U6 FPGA_1.U7 FPGA_1.U8 FPGA_1.U9 FPGA_1.U10 FPGA_1.U11 FPGA_1.U12 FPGA_1.U13 FPGA_1.U14 FPGA_1.U15 FPGA_1.U16 FPGA_1.U17 FPGA_1.U18 FPGA_1.V1 FPGA_1.V2 FPGA_1.V3 FPGA_1.V4 FPGA_1.V5 FPGA_1.V6 FPGA_1.V7 FPGA_1.V8 FPGA_1.V9 FPGA_1.V10 FPGA_1.V11 FPGA_1.V12 FPGA_1.V13 FPGA_1.V14 FPGA_1.V15 FPGA_1.V16 FPGA_1.V17 FPGA_1.V18 GG1.B8 GG1.B10 GG1.B11 GG1.C7 GG1.D4 GG1.D5 GG1.D7 GG1.E5 GG1.E6 GG1.E7 GG1.F5 GG1.F6 GG1.F7 GG1.F8 GG1.F9 GG1.G3 GG1.G4 GG1.G5 GG1.G6 GG1.G7 GG1.G8 GG1.G9 GG1.H6 GG1.H7 GG1.K4 GG1.K7 GG1.K8 GG1.K9 GG1.K10 GG1.L4 GG1.L7 GG1.L10 P1.2 P1.3 P1.5 P1.11 P1.15 P1.17 P9.12 P9.14 R8.2 R11.2 R17.2 R18.2 R19.2 R20.2 R21.2 U1.A1 U1.A2 U1.A3 U1.A4 U1.A5 U1.A6 U1.A7 U1.A8 U1.A9 U1.A10 U1.A11 U1.A12 U1.A13 U1.A14 U1.A15 U1.A16 U1.A18 U1.B2 U1.B3 U1.B4 U1.B6 U1.B7 U1.B8 U1.B9 U1.B11 U1.B12 U1.B13 U1.B14 U1.B16 U1.C1 U1.C2 U1.C3 U1.C4 U1.C5 U1.C6 U1.C7 U1.C8 U1.C9 U1.C10 U1.C11 U1.C12 U1.C13 U1.C14 U1.C15 U1.C16 U1.C17 U1.C18 U1.D1 U1.D2 U1.D3 U1.D4 U1.D5 U1.D6 U1.D8 U1.D9 U1.D10 U1.D11 U1.D12 U1.D14 U1.D17 U1.D18 U1.E1 U1.E3 U1.E4 U1.E6 U1.E7 U1.E8 U1.E11 U1.E12 U1.E13 U1.E15 U1.E16 U1.E18 U1.F1 U1.F2 U1.F3 U1.F4 U1.F5 U1.F6 U1.F7 U1.F8 U1.F9 U1.F10 U1.F11 U1.F12 U1.F13 U1.F14 U1.F15 U1.F16 U1.F17 U1.F18 U1.G1 U1.G2 U1.G3 U1.G5 U1.G6 U1.G8 U1.G9 U1.G11 U1.G12 U1.G13 U1.G14 U1.G16 U1.G17 U1.G18 U1.H1 U1.H2 U1.H3 U1.H4 U1.H5 U1.H6 U1.H7 U1.H8 U1.H10 U1.H12 U1.H13 U1.H14 U1.H15 U1.H16 U1.H17 U1.H18 U1.J1 U1.J3 U1.J4 U1.J6 U1.J7 U1.J9 U1.J11 U1.J13 U1.J15 U1.J16 U1.J18 U1.K1 U1.K2 U1.K3 U1.K4 U1.K5 U1.K6 U1.K8 U1.K10 U1.K12 U1.K13 U1.K14 U1.K15 U1.K16 U1.K17 U1.K18 U1.L1 U1.L2 U1.L3 U1.L4 U1.L5 U1.L6 U1.L7 U1.L9 U1.L11 U1.L12 U1.L13 U1.L14 U1.L15 U1.L16 U1.L17 U1.L18 U1.M1 U1.M2 U1.M3 U1.M5 U1.M6 U1.M8 U1.M10 U1.M11 U1.M13 U1.M14 U1.M16 U1.M17 U1.M18 U1.N1 U1.N2 U1.N3 U1.N4 U1.N5 U1.N6 U1.N7 U1.N8 U1.N9 U1.N10 U1.N11 U1.N12 U1.N13 U1.N14 U1.N15 U1.N16 U1.N17 U1.N18 U1.P1 U1.P2 U1.P3 U1.P4 U1.P6 U1.P7 U1.P8 U1.P11 U1.P12 U1.P15 U1.P16 U1.P17 U1.P18 U1.R1 U1.R3 U1.R4 U1.R5 U1.R7 U1.R8 U1.R9 U1.R10 U1.R11 U1.R13 U1.R14 U1.R15 U1.R18 U1.T1 U1.T2 U1.T3 U1.T4 U1.T5 U1.T6 U1.T7 U1.T8 U1.T9 U1.T10 U1.T11 U1.T12 U1.T13 U1.T14 U1.T15 U1.T16 U1.T17 U1.T18 U1.U1 U1.U2 U1.U3 U1.U5 U1.U6 U1.U7 U1.U8 U1.U10 U1.U11 U1.U12 U1.U13 U1.U15 U1.U16 U1.U17 U1.U18 U1.V1 U1.V3 U1.V4 U1.V5 U1.V6 U1.V7 U1.V8 U1.V9 U1.V10 U1.V11 U1.V12 U1.V13 U1.V14 U1.V15 U1.V16 U1.V17 U1.V18 U2.A1 U2.A2 U2.A3 U2.A4 U2.A5 U2.A6 U2.A7 U2.A8 U2.A9 U2.A10 U2.A11 U2.B1 U2.B2 U2.B3 U2.B4 U2.B5 U2.B6 U2.B7 U2.B8 U2.B9 U2.B10 U2.B11 U2.C1 U2.C2 U2.C3 U2.C4 U2.C5 U2.C6 U2.C8 U2.C9 U2.C10 U2.C11 U2.D1 U2.D2 U2.D3 U2.D6 U2.D8 U2.D9 U2.D10 U2.D11 U2.E1 U2.E2 U2.E3 U2.E4 U2.E5 U2.E6 U2.E7 U2.E8 U2.E9 U2.E10 U2.E11 U2.F1 U2.F2 U2.F3 U2.F4 U2.F5 U2.F6 U2.F7 U2.F10 U2.F11 U2.G1 U2.G2 U2.G5 U2.G6 U2.G7 U2.G10 U2.G11 U2.H1 U2.H2 U2.H3 U2.H4 U2.H5 U2.H8 U2.H9 U2.H10 U2.H11 U2.J1 U2.J2 U2.J3 U2.J4 U2.J5 U2.J6 U2.J7 U2.J8 U2.J9 U2.J10 U2.J11 U2.K1 U2.K2 U2.K3 U2.K5 U2.K6 U2.K11 U2.L1 U2.L2 U2.L3 U2.L5 U2.L6 U2.L8 U2.L9 U2.L11

## Polygon pours and split planes (outlines as drawn)
no net on Internal Plane 1 (split plane): 172.72,20.32 20.32,20.32 20.32,121.92 172.72,121.92
no net on Internal Plane 2 (split plane): 172.72,20.32 20.32,20.32 20.32,121.92 172.72,121.92

## Silkscreen, mask and mechanical layers (free items; w line width, h text height)
Mechanical 16:
  drawing of 1874 lines, arcs and shapes, not listed
  text "1" at 36.246,189.611 h1.78
  text "2" at 108.89,189.611 h1.78
  text "3" at 182.042,189.611 h1.78
  text "4" at 254.94,189.611 h1.78
  text "A" at 1.905,166.599 h1.78
  text "A" at 288.925,166.599 h1.78
  text "B" at 1.905,118.542 h1.78
  text "B" at 288.925,118.542 h1.78
  text "C" at 1.905,70.028 h1.78
  text "C" at 288.925,70.028 h1.78
  text "ENGINEER:" at 173.99,33.02 h1.14
  text "TITLE:" at 212.09,33.02 h1.14
  text "PCB DESIGNER:" at 173.99,25.527 h1.14
  text "D" at 1.905,22.022 h1.78
  text "D" at 288.925,22.022 h1.78
  text "DATE:" at 173.99,17.78 h1.14
  text "PART NO.:" at 212.09,17.78 h1.14
  text "REV:" at 265.43,17.78 h1.14
  text "Altium Limited" at 140.97,15.24 h1.78
  text ".PRINT_DATE" at 175.26,14.732 h1.78
  text "12a Rodborough Rd" at 140.97,12.7 h1.78
  text "Frenchs Forest" at 140.97,10.16 h1.78
  text "FILE NAME:" at 173.99,10.16 h1.14
  text "DWG NO:" at 212.09,10.16 h1.14
  text "SCALE:" at 265.43,10.16 h1.14
  text "NSW 2086" at 140.97,7.62 h1.78
  text ".PCB_FILE_NAME_NO_PATH" at 175.26,7.112 h1.78
  text "1" at 36.246,1.651 h1.78
  text "2" at 108.89,1.651 h1.78
  text "3" at 182.042,1.651 h1.78
  text "4" at 254.94,1.651 h1.78

## Text inside footprints (layer, text, board x,y; h text height)
P1: Top Overlay "20" at 63.246,78.613 h1.27 r90; Top Overlay "19" at 65.786,78.613 h1.27 r90; Top Overlay "1" at 65.786,51.689 h1.27 r90; Top Overlay "2" at 63.246,51.689 h1.27 r90
P9: Top Overlay "2" at 175.895,92.329 h1.27 r90; Top Overlay "1" at 178.435,92.329 h1.27 r90; Top Overlay "14" at 175.895,112.649 h1.27 r90; Top Overlay "13" at 178.435,112.649 h1.27 r90
P10: Top Overlay "10" at 299.847,210.82 h1.27 r90; Top Overlay "9" at 302.387,210.82 h1.27 r90; Top Overlay "1" at 302.387,197.104 h1.27 r90; Top Overlay "2" at 299.847,196.596 h1.27 r90